# Altium PCB PCB_8Relay.PcbDoc
Units mm, origin at the board's own origin, x right, y up, seen from the top; angles counter-clockwise.
Board outline 114.55 x 24.38 mm, 2 copper layers (Top Layer, Bottom Layer); 37 components, 40 nets, 118 pads, 13 vias.
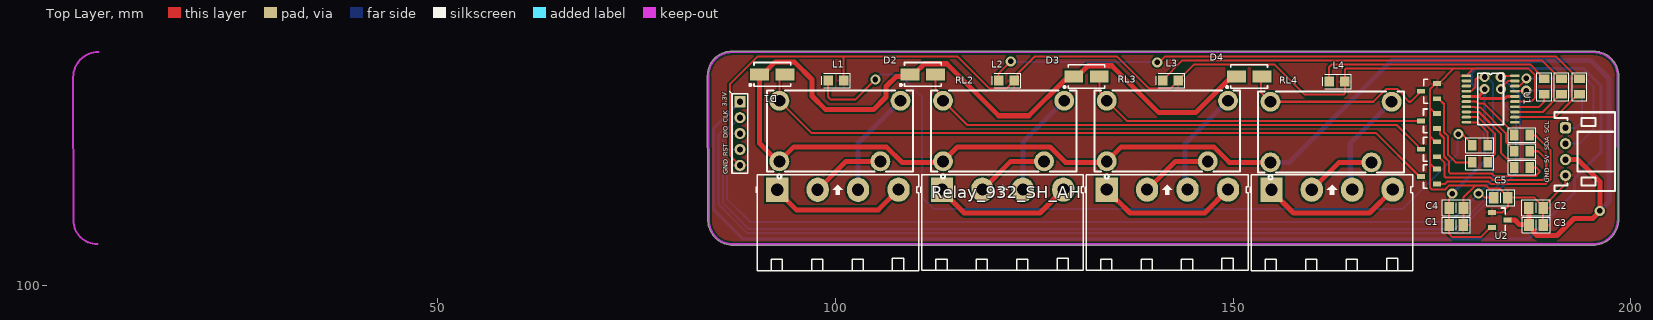
[diagram p0: Top Layer view]
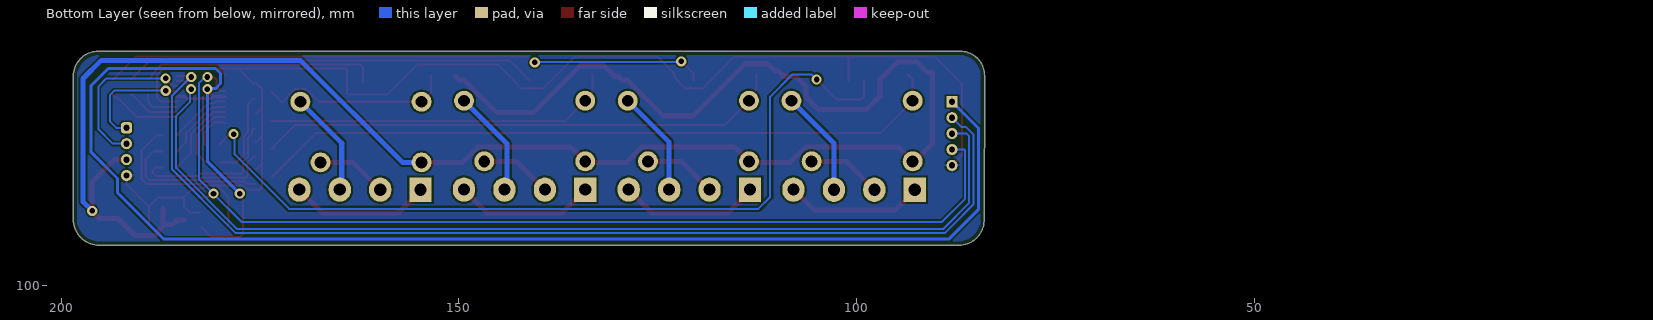
[diagram p1: Bottom Layer view, seen from below]

## Layer stack, top to bottom
Top Solder: solder mask 0.0102, Solder Resist, Dk 3.5
Top Layer: signal copper 0.0356
Dielectric 1: dielectric 0.32, FR-4, Dk 4.8
Bottom Layer: signal copper 0.0356
Bottom Solder: solder mask 0.0102, Solder Resist, Dk 3.5

## Board outline
83.996,108.076 83.923,126.341 83.923,126.342 cw(c86.995,126.342) 86.995,129.413 195.326,129.413 cw(c195.326,126.286) 198.453,126.286 198.45,126.258 198.473,108.303 cw(c195.199,108.303) 195.199,105.029 87.122,105.029 cw(c87.122,108.156)

## Design rules (kind name [scope] priority, off if disabled: settings)
Clearance [All] p1: gap=0.254 ignorepadtopadclearanceinfootprint=FALSE except(0: Arc-Hole Track-Hole SMDPad-Hole THPad-Hole Via-Hole Fill-Hole Poly-Hole Region-Hole Text-Hole)
PolygonConnect [All] p1: connectstyle=Relief reliefconductorwidth=0.254 reliefentries=4 polygonreliefangle="90 Angle" airgapwidth=0.254
RoutingVias [All] p1: holewidth=0.711 width=1.27 viastyle="Through Hole" minholewidth=0.711 minwidth=1.27 maxholewidth=0.711 maxwidth=1.27
SolderMaskExpansion [All] p1: expansion=0.102 istentingtop=FALSE
Width [All] p1: maxlimit=0.762 minlimit=0.254 preferedwidth=0.254 minimp=50.000000 maximp=50.000000 favimp=50.000000
30 further rules are at their usual default settings.

## Classes and differential pairs
component class SCH_8Relay: C1 C2 C3 C4 C5 D1 D2 D3 D4 L1 L2 L3 L4 RL2 RL3 RL4 U1 U2

## Components (designator, comment, footprint, x,y, rotation, side; value= is the part's Value field where it differs from the comment)
C1 "1u" "C 0805" 178.043,107.569 r0 top
C2 "1u" "C 0805" 188.076,109.728 r0 top
C3 "0.1m" "C 0805" 188.087,107.569 r0 top
C4 "0.1m" "C 0805" 178.054,109.728 r0 top
C5 "0.1m" "C 0805" 183.631,110.998 r180 top
D1 "Diode" "DO-214AC (SMA)" 92.075,126.492 r180 top
D2 "Diode" "DO-214AC (SMA)" 110.998,126.492 r180 top
D3 "Diode" "DO-214AC (SMA)" 131.572,126.238 r180 top
D4 "D4" "DO-214AC (SMA)" 152.019,126.238 r180 top
L1 "Led" "Led 0805" 100.076,125.73 r0 top
L2 "Led" "Led 0805" 121.498,125.73 r0 top
L3 "Led" "Led 0805" 142.113,125.73 r0 top
L4 "Led" "Led 0805" 163.068,125.603 r0 top
P1 "Header 4" HDR/Terminal/4/RA 100.325,112.009 r0 top
P2 "Header 4" HDR/Terminal/4/RA 121.034,112.017 r0 top
P3 "Header 4" HDR/Terminal/4/RA 141.735,112.017 r0 top
P4 "Header 4" HDR/Terminal/4/RA 162.433,112.014 r0 top
P? "Header 5" HDR/Header/5/2mm 88.011,119.063 r270 top
P? "Header 4" HDR/Header/4/2mm/BOX/RA 191.77,116.792 r270 top
Q1 "Transistor NPN" SOT-23 174.625,113.665 r180 top
Q2 "Transistor NPN" SOT-23 174.625,117.094 r180 top
Q3 "Transistor NPN" SOT-23 174.625,120.65 r180 top
Q4 "Transistor NPN" SOT-23 174.641,124.394 r180 top
R1 "R" "R 0805" 186.309,118.872 r0 top
R2 "R" "R 0805" 186.309,116.84 r0 top
R3 "" "R 0805" 186.309,114.808 r0 top
R4 "R4" "R 0805" 181.016,115.443 r180 top
R5 "R" "R 0805" 189.103,124.968 r90 top
R6 "R" "R 0805" 181.016,117.602 r180 top
R7 "R" "R 0805" 193.548,124.968 r90 top
R8 "R" "R 0805" 191.262,124.968 r90 top
RL1 "Relay_932_SH_AH" RELAY932 99.756,107.255 r0 top
RL2 "Relay_932_SH_AH" RELAY932 120.33,107.255 r0 top
RL3 "Relay_932_SH_AH" RELAY932 140.904,107.255 r0 top
RL4 "Relay_932_SH_AH" RELAY932 161.478,107.128 r0 top
U1 "STM32F030F4P6" ST/TSSOP20 182.37,123.403 r0 top
U2 "SOT23" SOT-23 183.515,108.204 r0 top

## Footprints (in the part's own frame and the unit in brackets; to place one, negate y for a bottom-side part, rotate by r counter-clockwise, add the part's x,y. Pads: shape width x height; smd on the part's side, far side on the other; paste and mask are expansions set on the pad)
"C 0805" [mm] "Chip Capacitor, 2-Leads, Body 2.0x1.3mm, IPC Medium Density"
  rect 1.2x1.5 smd: 1(-0.9,0) 2(0.9,0)
  silkscreen extent -1.78,-1 1.78,1, body extent -1,-0.64 1,0.61, height 0.6
"DO-214AC (SMA)" [mm] "Molded Diode, 2-Leads, Body 4.3x2.7mm, IPC Medium Density"
  rect 2.35x1.55 smd: 1(-1.6,0) 2(1.6,0)
  silkscreen extent -2.3,-1.5 2.89,1.5, body extent -2.6,-1.3 2.6,1.3, height 2.4
HDR/Header/4/2mm/BOX/RA [mm]
  rrect50% 1.4x1.4 hole 0.8: 1(-3,0)
  round 1.4 hole 0.8: 2(-1,0) 3(1,0) 4(3,0)
  silkscreen extent -4.95,-1.35 4.95,6.25, body extent -4.95,-1.35 4.95,6.25, height 4.8
HDR/Header/5/2mm [mm]
  rect 1.4x1.4 hole 0.8: 1(-4,0)
  round 1.4 hole 0.8: 2(-2,0) 3(0,0) 4(2,0) 5(4,0)
  silkscreen extent -5.3,-1.3 5,1, body extent -4.98,-1 4.97,1, height 6
HDR/Terminal/4/RA [mil] "Header 4, 4 pin, hight 300mil, Pin to Pin 200, Colour Green"
  rect 110x120 hole 60: 1(-300.2,-0.2)
  oval 110x120 hole 60: 2(-100.2,-0.2) 3(99.87,-0.13) 4(300.2,0.2)
  silkscreen extent -405,-400 400,75, body extent -390,-403 392,70, height 334
"Led 0805" [mm] "Led SMD 0805"
  rect 1.2x1.3 smd: 1(-0.975,0) 2(0.975,0)
  silkscreen extent -1.78,-0.89 1.78,0.89, body extent -1.01,-0.64 1.01,0.61, height 1.1
"R 0805" [mm] "Chip Resistor, 2-Leads, Body 2.0x1.3mm, IPC Medium Density"
  rect 1.05x1.35 smd: 1(-0.975,0) 2(0.975,0)
  silkscreen extent -1.75,-0.92 1.75,0.92, body extent -1,-0.61 1,0.59, height 0.5
RELAY932 [mm]
  round 2.5 hole 1.5 paste+0 mask+0.051: 1(-6.792,8.315) 2(5.908,8.315) 3(8.448,15.935) 4(-6.792,15.935)
  silkscreen extent -8.32,6.16 9.98,17.22, body extent -8.25,6.98 10.03,17.27, height 6.35
SOT-23 [mm] "SOT23, 3-Leads, Body 3.0x2.5mm (max), Pitch 0.95mm, IPC Medium Density"
  rect 1x0.6 smd: 1(-1,0.95) 2(-1,-0.95) 3(1,0)
  silkscreen extent 0.2,-1.5 0.7,1.5, body extent -1.28,-1.46 1.27,1.46, height 0.95
ST/TSSOP20 [mm]
  rect 1.2x0.36 smd: 1(-3.05,2.925)
  oval 1.2x0.36 smd: 2(-3.05,2.275) 3(-3.05,1.625) 4(-3.05,0.975) 5(-3.05,0.325) 6(-3.05,-0.325) 7(-3.05,-0.975) 8(-3.05,-1.625) 9(-3.05,-2.275) 10(-3.05,-2.925) 11(3.05,-2.925) 12(3.05,-2.275) 13(3.05,-1.625) 14(3.05,-0.975) 15(3.05,-0.325) 16(3.05,0.325) 17(3.05,0.975) 18(3.05,1.625) 19(3.05,2.275) 20(3.05,2.925)
  silkscreen extent -1.61,-3.25 1.61,3.25, body extent -3.14,-3.35 3.14,3.15, height 1.09

## Part data
C1 C2 C3 C4 C5: library part "Capacitor NP", "Capacitor non-pol"
D1 D2 D3: "Default Diode"
D4: library part Diode, "Default Diode"
L1 L2 L3 L4: "Typical LED"
P1 P2 P3 P4 P?: "Header, 4-Pin"
P?: "Header, 5-Pin"
Q1 Q2 Q3 Q4: "NPN Bipolar Transistor"
R1 R2 R3 R4 R5 R6 R7 R8: library part Resistor, "Resistor"
U1: "IC MCU 32BIT 16KB FLASH 20TSSOP", Base Part Number=STM32F030, Manufacturer=STMicroelectronics, Operating Temperature="-40°C ~ 85°C (TA)", PACKAGE="20-TSSOP (0.173\", 4.40mm Width)", Supplier Part Number 1=497-14044-5-ND, Voltage - Supply (Vcc/Vdd)="2.4 V ~ 3.6 V", Category="Integrated Circuits (ICs)", ComponentLink1Description=http://www.st.com/content/ccc/resource/technical/document/datasheet/a4/5d/0b/0e/87/c4/4d/71/DM00088500.pdf/files/DM00088500.pdf/jcr:content/translations/en.DM00088500.pdf, ComponentLink1URL=http://www.st.com/content/ccc/resource/technical/document/datasheet/a4/5d/0b/0e/87/c4/4d/71/DM00088500.pdf/files/DM00088500.pdf/jcr:content/translations/en.DM00088500.pdf, Connectivity="I²C, SPI, UART/USART", Core Processor="ARM® Cortex®-M0", Core Size=32-Bit, Data Converters="A/D 11x12b", EEPROM Size=-, Manufacturer Part Number=STM32F030F4P6, Oscillator Type=Internal, Packaging=Tube, Part Status=Active, Peripherals="DMA, POR, PWM, WDT", Pricing 1="1=1.3, 74=1.10122, 148=0.90459, 518=0.74728, 1036=0.58995 (USD)", Program Memory Size="16KB (16K x 8)", Program Memory Type=FLASH, RAM Size="4K x 8", RoHS="RoHS Compliant", Speed=48MHz, Stock 1=8559, Supplier 1=Digi-Key
U2: library part XC6206P332MR-G, "LDO Voltage Regulators 1uA Low Quiescent 3 Terminal, Low ESR Cap. Compatible, Voltage Regulator", PACKAGE=SOT-23-3, BRAND="Torex Semiconductor", TYPE=SMD

## Via types
v1: diameter 1.27, hole 0.711, Top Layer to Bottom Layer, 13 vias

## Nets (pads, with @x,y where several pads share a name; then routed paths per layer and width w, separated by ;. In a path a pad name is that pad's centre, name@x,y a point inside that pad or via, vN(x,y) a via of type N, cw(c..) or ccw(c..) an arc to the next point about the centre after c; other vN are vias at no path point)
+5: C2.1 C3.1 D1.2 D2.2 D3.2 D4.2 P?.3@191.77,115.792 RL1.1 RL2.1 RL3.1 RL4.1 U2.3 | length 246.3
  Top Layer w0.635: D1.2 90.475,117.837 92.742,115.57 RL1.1 94.785,117.391 106.418,117.391 108.367,115.443 113.411,115.443 RL2.1 115.359,117.391 126.992,117.391 128.941,115.443 133.985,115.443 RL3.1 135.933,117.391 147.566,117.391 149.515,115.443 RL4.1 ; D1.2@90.475,126.741 91.124,126.741 92.462,128.079 94.846,128.079 97.062,125.863 97.062,123.791 98.786,122.067 104.795,122.067 106.383,123.655 106.383,124.975 107.642,126.235 109.141,126.235 109.856,126.949 110.312,126.949 110.851,127.488 110.851,127.504 111.186,127.838 114.01,127.838 120.543,121.305 124.317,121.305 128.793,125.781 129.515,125.781 D3.2 ; D3.2@130.372,126.238 131.007,126.873 131.049,126.873 131.76,127.584 134.758,127.584 140.657,121.686 145.272,121.686 149.367,125.781 149.962,125.781 D4.2 ; U2.3 185.42,108.204 186.006,107.618 187.13,107.618 C3.1@187.173,107.574 ; C2.1@187.173,109.725 C3.1@187.173,107.574 ; C3.1@187.187,107.56 C3.1@187.173,107.574 ; P?.3@191.77,115.792 193.326,115.792 196.088,113.03 v1(196.088,109.347) ; v1@196.088,109.265 195.208,108.385 192.848,108.385 190.711,106.247 188.15,106.247 187.815,106.582 187.815,106.765 187.47,107.111 187.47,107.136 187.198,107.408 187.184,107.408 187.173,107.419 C3.1@187.173,107.574
  Bottom Layer w0.635: RL4.1 157.099,115.443 169.926,128.27 194.945,128.27 197.231,125.984 197.231,110.49 v1(196.088,109.347)
CLK: P?.2@88.011,121.063 U1.20 | length 132.3
  Top Layer w0.254: v1(183.642,126.174) 183.775,126.308 185.4,126.308 U1.20
  Bottom Layer w0.254: P?.2@88.011,121.063 86.848,119.9 86.288,119.9 85.344,118.955 85.344,110.153 88.182,107.315 88.944,106.553 178.05,106.553 178.812,107.315 186.055,114.558 186.055,123.802 183.682,126.174 v1(183.642,126.174)
DIO: P?.3@88.011,119.063 U1.19 | length 127.8
  Top Layer w0.254: v1(183.652,124.651) 183.652,124.748 184.582,125.678 U1.19
  Bottom Layer w0.254: P?.3@88.011,119.063 86.17,119.063 85.852,118.745 85.852,110.363 89.154,107.061 177.84,107.061 185.547,114.768 185.547,121.285 183.772,123.06 183.772,124.531 v1(183.652,124.651)
GND: C1.2 C2.2 C3.2 C4.2 C5.1 L1.2 L2.2 L3.2 L4.2 P?.4@191.77,113.792 P?.5 Q1.2 Q2.2 Q3.2 Q4.2 U1.1 U1.15 U2.1 | length 187.1
  Top Layer w0.254: P?.5 86.741,116.333 86.741,125.247 90.272,128.778 115.316,128.778 119.395,124.699 121.492,124.699 122.473,125.68 L2.2 122.9,126.157 122.9,126.583 125.095,128.778 135.382,128.778 139.461,124.699 142.107,124.699 143.088,125.68 L3.2 143.088,125.78 143.561,126.253 143.611,126.253 145.12,127.762 155.194,127.762 159.004,123.952 163.894,123.952 164.043,124.101 164.043,127.105 164.192,127.254 177.751,127.254 ; L1.2 101.051,128.737 101.092,128.778 ; Q1.2 175.425,114.615 174.744,115.296 ; Q2.2 175.425,118.044 174.744,118.725 ; Q3.2 175.425,121.6 174.76,122.265 ; C1.2 178.954,107.58 C4.2 178.954,111.049 180.427,112.522 ; U1.1 180.246,127.254 ; U2.1 183.83,109.154 184.531,109.855 C5.1 ; U1.15 185.44,123.098 187.487,123.098 187.96,123.571 187.96,126.405 187.111,127.254 180.246,127.254 ; C3.2 188.976,107.58 C2.2 C2.2@188.976,109.878 ; P?.4@191.77,113.792 191.77,112.672 C2.2@188.976,109.878 ; 174.744,115.296 174.744,118.725 ; 174.744,115.296 174.744,112.257 174.967,112.034 176.637,112.034 177.125,112.522 180.427,112.522 ; 174.744,118.725 174.744,122.249 174.76,122.265 ; 174.76,122.265 174.76,124.663 175.441,125.344 Q4.2 175.841,125.344 177.751,127.254 ; 177.751,127.254 180.246,127.254 ; 180.427,112.522 181.792,112.522 182.173,112.141 183.538,112.141 184.531,111.148 C5.1 ; C5.1 187.856,110.998 C2.2@188.976,109.878
NetL1_1: L1.1 R6.2 | length 104.8
  Top Layer w0.254: L1.1 99.101,123.657 99.441,123.317 102.489,123.317 v1(105.029,125.857) ; v1(178.308,118.999) 178.502,118.805 178.988,118.805 180.041,117.752 R6.2
  Bottom Layer w0.254: v1(105.029,125.857) 105.664,126.492 108.077,126.492 110.871,123.698 110.871,111.091 112.361,109.601 171.323,109.601 178.181,116.459 178.181,118.872 v1(178.308,118.999)
NetL2_1: L2.1 R7.2 | length 76.1
  Top Layer w0.254: L2.1 120.523,126.619 v1(122.047,128.143) ; v1(140.462,128.016) 140.716,128.016 141.478,128.778 190.563,128.778 193.398,125.943 R7.2
  Bottom Layer w0.254: v1(122.047,128.143) 122.111,128.079 140.398,128.079 v1(140.462,128.016)
NetL3_1: L3.1 R8.2 | length 52.2
  Top Layer w0.254: L3.1 141.138,125.78 143.628,128.27 188.785,128.27 191.112,125.943 R8.2
NetL4_1: L4.1 R5.2 | length 30
  Top Layer w0.254: L4.1@162.052,125.476 162.052,127.39 162.424,127.762 187.321,127.762 188.555,126.528 188.555,126.341 188.953,125.943 R5.2 ; L4.1 L4.1@162.093,125.653
NetP1_1: P1.1 P1.4 | length 17.4
  Top Layer w0.635: P1.1 92.7,111.877 95.103,109.474 105.41,109.474 P1.4
NetP1_2: P1.2 RL1.2 | length 9.4
  Top Layer w0.635: P1.2 101.346,115.57 RL1.2
NetP1_3: P1.3 RL1.3 | length 13.4
  Bottom Layer w0.635: P1.3 102.862,117.848 RL1.3
NetP2_1: P2.1 P2.4 | length 17.7
  Top Layer w0.635: P2.1 113.409,111.885 116.202,109.093 125.73,109.093 P2.4
NetP2_2: P2.2 RL2.2 | length 9.2
  Top Layer w0.635: P2.2 122.047,115.57 RL2.2
NetP2_3: P2.3 RL2.3 | length 13.3
  Bottom Layer w0.635: P2.3 123.571,117.983 RL2.3
NetP3_1: P3.1 P3.4 | length 17.7
  Top Layer w0.635: P3.1 134.11,111.885 135.38,110.615 135.507,110.615 137.03,109.093 146.431,109.093 P3.4
NetP3_2: P3.2 RL3.2 | length 9.1
  Top Layer w0.635: P3.2 142.748,115.57 RL3.2
NetP3_3: P3.3 RL3.3 | length 13.5
  Bottom Layer w0.635: P3.3 143.967,112.319 143.967,117.805 RL3.3
NetP4_1: P4.1 P4.4 | length 17.7
  Top Layer w0.635: P4.1 154.808,111.882 157.597,109.093 167.132,109.093 P4.4
NetP4_2: P4.2 RL4.2 | length 8.9
  Top Layer w0.635: P4.2 163.322,115.443 RL4.2
NetP4_3: P4.3 RL4.3 | length 13.3
  Bottom Layer w0.635: P4.3 164.719,112.261 164.719,117.856 RL4.3
NetR1_1: R1.1 U1.6 | length 7.8
  Top Layer w0.254: U1.6 180.534,123.078 180.757,122.854 181.502,122.854 185.334,119.022 R1.1
NetR2_1: R2.1 U1.7 | length 9
  Top Layer w0.254: U1.7 180.382,122.428 180.464,122.346 181.057,122.346 184.277,119.126 184.277,118.047 185.334,116.99 R2.1
NetR3_1: R3.1 U1.8 | length 10.4
  Top Layer w0.254: U1.8 180.903,121.778 183.642,119.039 183.642,116.65 185.334,114.958 R3.1
NetR4_1: R4.1 U1.9 | length 8.4
  Top Layer w0.254: U1.9 180.834,121.128 182.897,119.065 182.897,116.499 181.991,115.593 R4.1
NetR5_1: R5.1 U1.14 | length 4.9
  Top Layer w0.254: U1.14 188.468,122.428 189.103,123.063 R5.1
NetR6_1: R6.1 U1.10 | length 4.8
  Top Layer w0.254: U1.10 180.766,120.478 181.991,119.253 R6.1
NetR7_1: R7.1 U1.12 | length 9.3
  Top Layer w0.254: U1.12 190.47,121.128 192.937,123.595 193.15,123.595 R7.1
NetR8_1: R8.1 U1.13 | length 6.8
  Top Layer w0.254: U1.13 188.897,121.778 191.112,123.993 R8.1
NRST: C5.2 P?.4@88.011,117.063 U1.4 | length 126.6
  Top Layer w0.254: U1.4 179.34,124.398 179.904,124.398 180.467,124.962 180.467,125.857 180.743,126.133 181.568,126.133 v1(181.61,126.174) ; v1(180.848,111.506) 181.123,111.506 181.631,110.998 C5.2
  Bottom Layer w0.254: P?.4@88.011,117.063 86.509,117.063 86.36,116.914 86.36,110.871 89.281,107.95 177.292,107.95 v1(180.848,111.506) 182.636,113.294 182.636,125.445 182.387,125.694 182.365,125.694 181.885,126.174 v1(181.61,126.174)
RL1: D1.1 Q1.3 RL1.4 | length 88.2
  Top Layer w0.254: D1.1 93.612,126.492 92.964,125.844 RL1.4 97.028,119.126 167.964,119.126 173.425,113.665 Q1.3
RL2: D2.1 Q2.3 RL2.4 | length 66.4
  Top Layer w0.254: D2.1 112.598,124.557 113.538,123.617 RL2.4 116.586,120.142 170.577,120.142 173.252,117.467 173.252,117.267 173.425,117.094 Q2.3
RL3: D3.1 Q3.3 RL3.4 | length 44.3
  Top Layer w0.254: D3.1@133.223,126.492 133.223,124.354 134.239,123.338 RL3.4@134.239,123.19 ; RL3.4 136.652,120.65 Q3.3
RL4: D4.1 Q4.3 RL4.4 | length 24.7
  Top Layer w0.254: D4.1@153.492,126.365 153.492,124.257 RL4.4 167.619,123.063 169.25,124.694 170.602,124.694 171.557,123.739 171.557,123.606 172.1,123.063 172.31,123.063 Q4.3
SCL: P?.1@191.77,119.792 U1.17 | length 14.4
  Top Layer w0.254: U1.17 185.44,124.398 186.79,124.398 v1(186.843,124.451)
  Bottom Layer w0.254: v1(186.843,124.451) 193.303,124.451 193.87,123.884 193.87,120.591 193.071,119.792 P?.1@191.77,119.792
SDA: P?.2@191.77,117.792 U1.18 | length 20.5
  Top Layer w0.254: U1.18 185.44,125.048 186.004,125.048 186.858,125.903 v1(186.858,126.003)
  Bottom Layer w0.254: v1(186.858,126.003) 194.291,126.003 195.326,124.968 195.326,119.634 193.484,117.792 P?.2@191.77,117.792
Tran1: Q1.1 R1.2 | length 21.8
  Top Layer w0.254: Q1.1 176.6,112.715 176.915,113.03 182.113,113.03 182.407,112.736 189.312,112.736 189.865,113.289 189.865,116.967 188.041,118.791 187.365,118.791 R1.2
Tran2: Q2.1 R2.2 | length 20.8
  Top Layer w0.254: Q2.1 175.825,116.144 176.581,115.387 176.581,113.687 176.73,113.538 182.323,113.538 182.617,113.244 188.934,113.244 189.357,113.667 189.357,115.824 188.341,116.84 R2.2
Tran3: Q3.1 R3.2 | length 19.5
  Top Layer w0.254: Q3.1 175.825,119.7 175.998,119.527 175.998,119.01 176.506,118.502 176.506,116.181 177.112,115.575 177.112,114.247 177.314,114.046 182.533,114.046 182.827,113.752 188.047,113.752 188.49,114.195 188.49,114.405 188.087,114.808 R3.2
Tran4: Q4.1 R4.2 | length 11.2
  Top Layer w0.254: Q4.1 175.841,123.444 176.506,122.779 176.506,119.22 177.014,118.712 177.014,116.392 177.963,115.443 R4.2
Vout: C1.1 C4.1 P?.1@88.011,123.063 U1.5 U1.16 U2.2 | length 196.3
  Top Layer w0.254: v1(177.546,111.506) 177.546,111.251 177.154,110.859 C4.1 177.154,107.58 C1.1 177.143,106.448 177.546,106.045 181.106,106.045 182.315,107.254 U2.2
  Top Layer w0.381: U1.5 180.868,123.728 ; v1(181.62,124.651) 181.62,124.483 181.066,123.929 181.066,123.926 180.868,123.728 ; U1.16 184.401,123.728 184.117,123.444 181.152,123.444 180.868,123.728
  Bottom Layer w0.381: P?.1@88.011,123.063 84.709,119.761 84.709,109.496 88.414,105.791 187.071,105.791 192.915,111.635 192.915,113.408 196.215,116.708 196.215,125.095 194.056,127.254 180.594,127.254 179.959,126.619 179.959,125.349 180.594,124.714 181.62,124.714 181.62,115.58 v1(177.546,111.506)
pads on no net: U1.2 U1.3 U1.11

## Polygon pours and split planes (outlines as drawn)
GND on Top Layer "GND_L01_P000" (solid, pour order 0): 83.992,125.845 84.023,125.895 cw(c87.481,126.212) 87.04,129.655 194.99,129.655 cw(c194.99,126.226) 198.419,126.226 198.419,108.192 cw(c194.947,108.996) 195.752,105.525 86.659,105.525 cw(c87.315,108.721) 84.119,108.065
GND on Bottom Layer "GND_L02_P001" (solid, pour order 1): 84.455,126.746 cw(c87.211,126.149) 86.614,128.905 195.58,128.905 cw(c195.072,125.984) 197.993,126.492 197.993,107.95 cw(c195.072,108.458) 195.58,105.537 86.868,105.537 cw(c87.376,108.458) 84.455,107.95

## Keep-outs
Top Layer:
  lines w0.254: 4.23,108.174 ccw(c7.23,108.174) 7.23,105.174 ; 4.234,108.182 4.211,126.157 cw(c7.357,126.157) 7.357,129.304 ; 84.115,108.12 84.051,126.342 cw(c86.995,126.342) 86.995,129.286 195.326,129.286 cw(c195.326,126.286) 198.326,126.286 ; 84.122,108.156 ccw(c87.122,108.156) 87.122,105.156 ; 87.199,105.156 195.199,105.156 ccw(c195.199,108.303) 198.346,108.303 198.323,126.277

## Silkscreen, mask and mechanical layers (free items; w line width, h text height)
Top Overlay:
  text "3.3V" at 86.603,122.428 h1 r90
  text "CLK" at 86.73,120.396 h1 r90
  text "SCL" at 189.981,119.126 h1 r90
  text "DIO" at 86.73,118.491 h1 r90
  text "SDA" at 189.981,116.967 h1 r90
  text "RST" at 86.73,116.205 h1 r90
  text "5V" at 189.981,115.316 h1 r90
  text "GND" at 86.73,113.919 h1 r90
  text "GND" at 189.981,112.903 h1 r90